# Altium PCB TEMP_SENS_1.PcbDoc
Units mil, origin at the board's own origin, x right, y up, seen from the top; angles counter-clockwise.
Board outline 866.14 x 944.88 mil, 2 copper layers (Top Layer, Bottom Layer); 18 components, 9 nets, 41 pads, 25 vias.
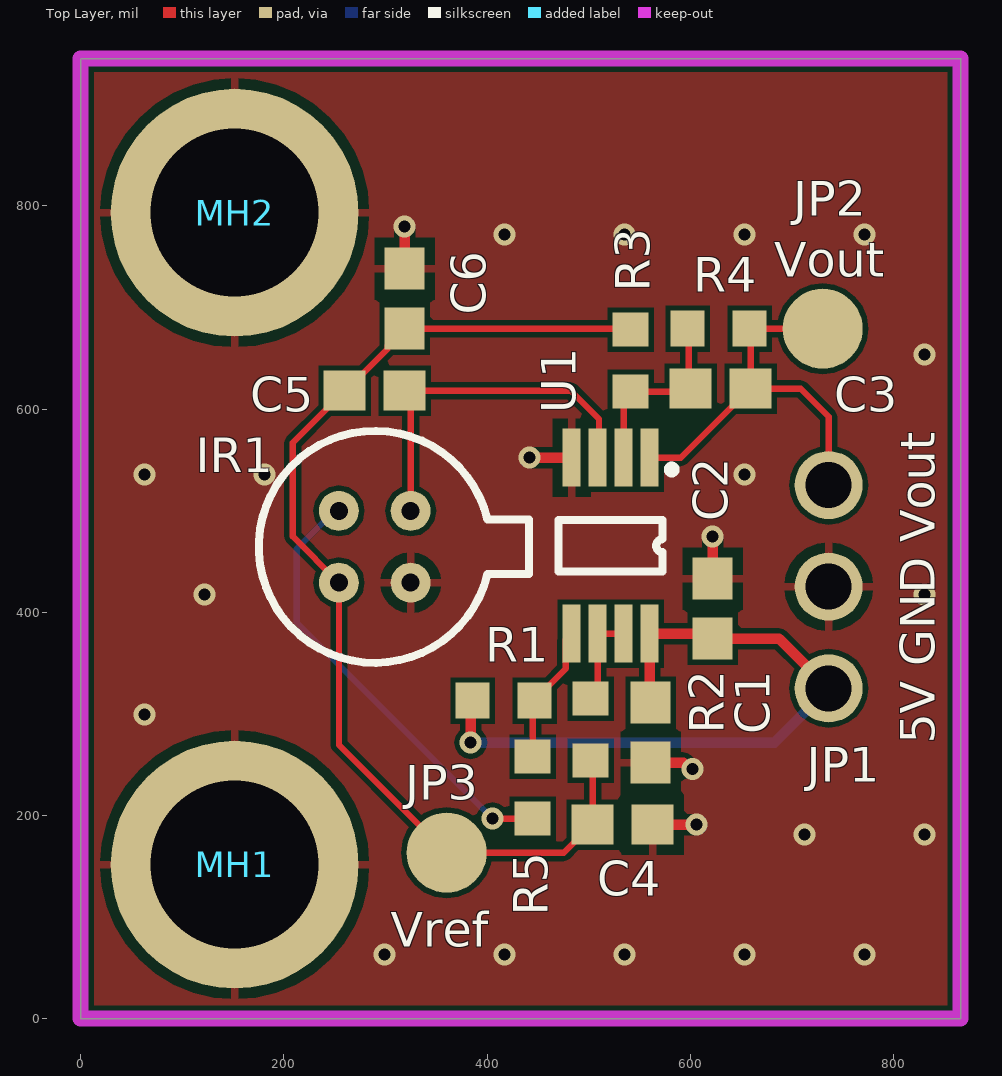
[diagram p0: Top Layer view]
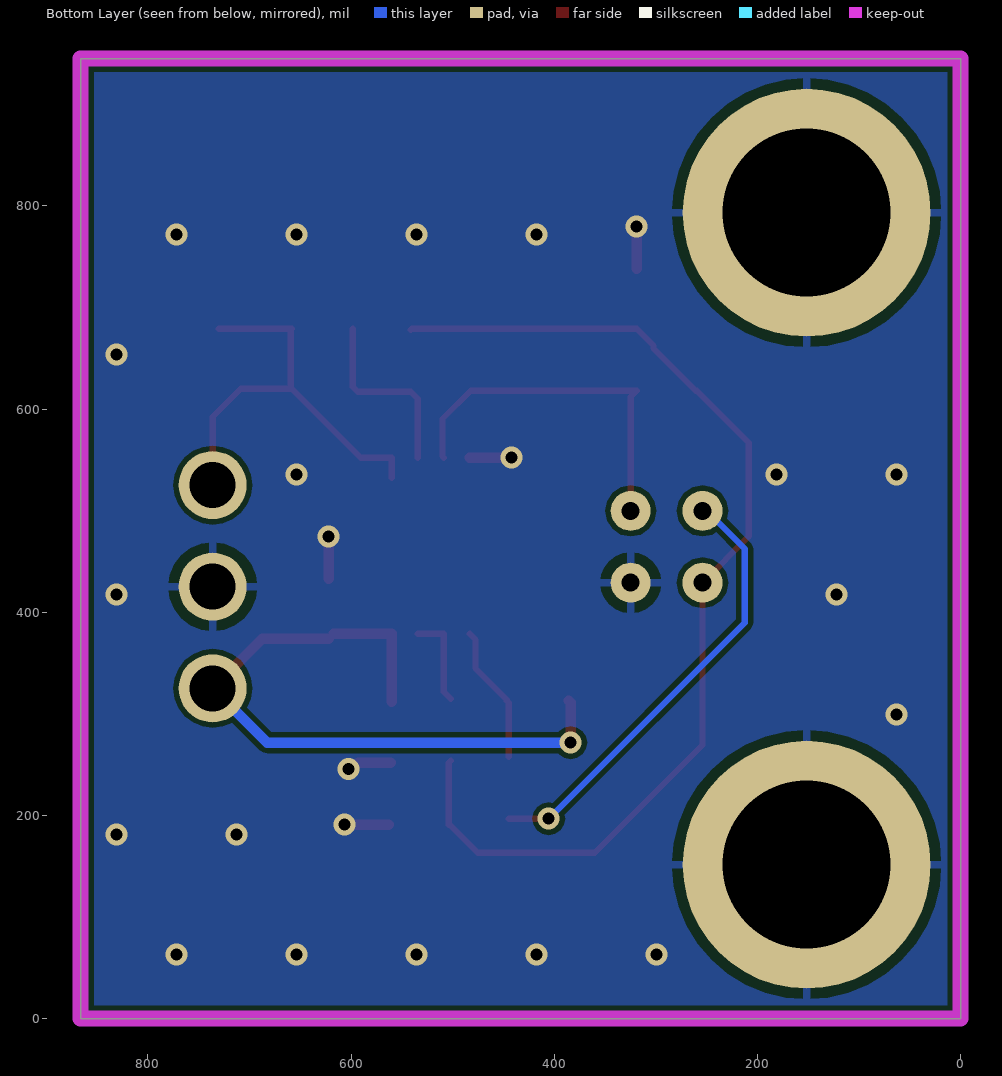
[diagram p1: Bottom Layer view, seen from below]
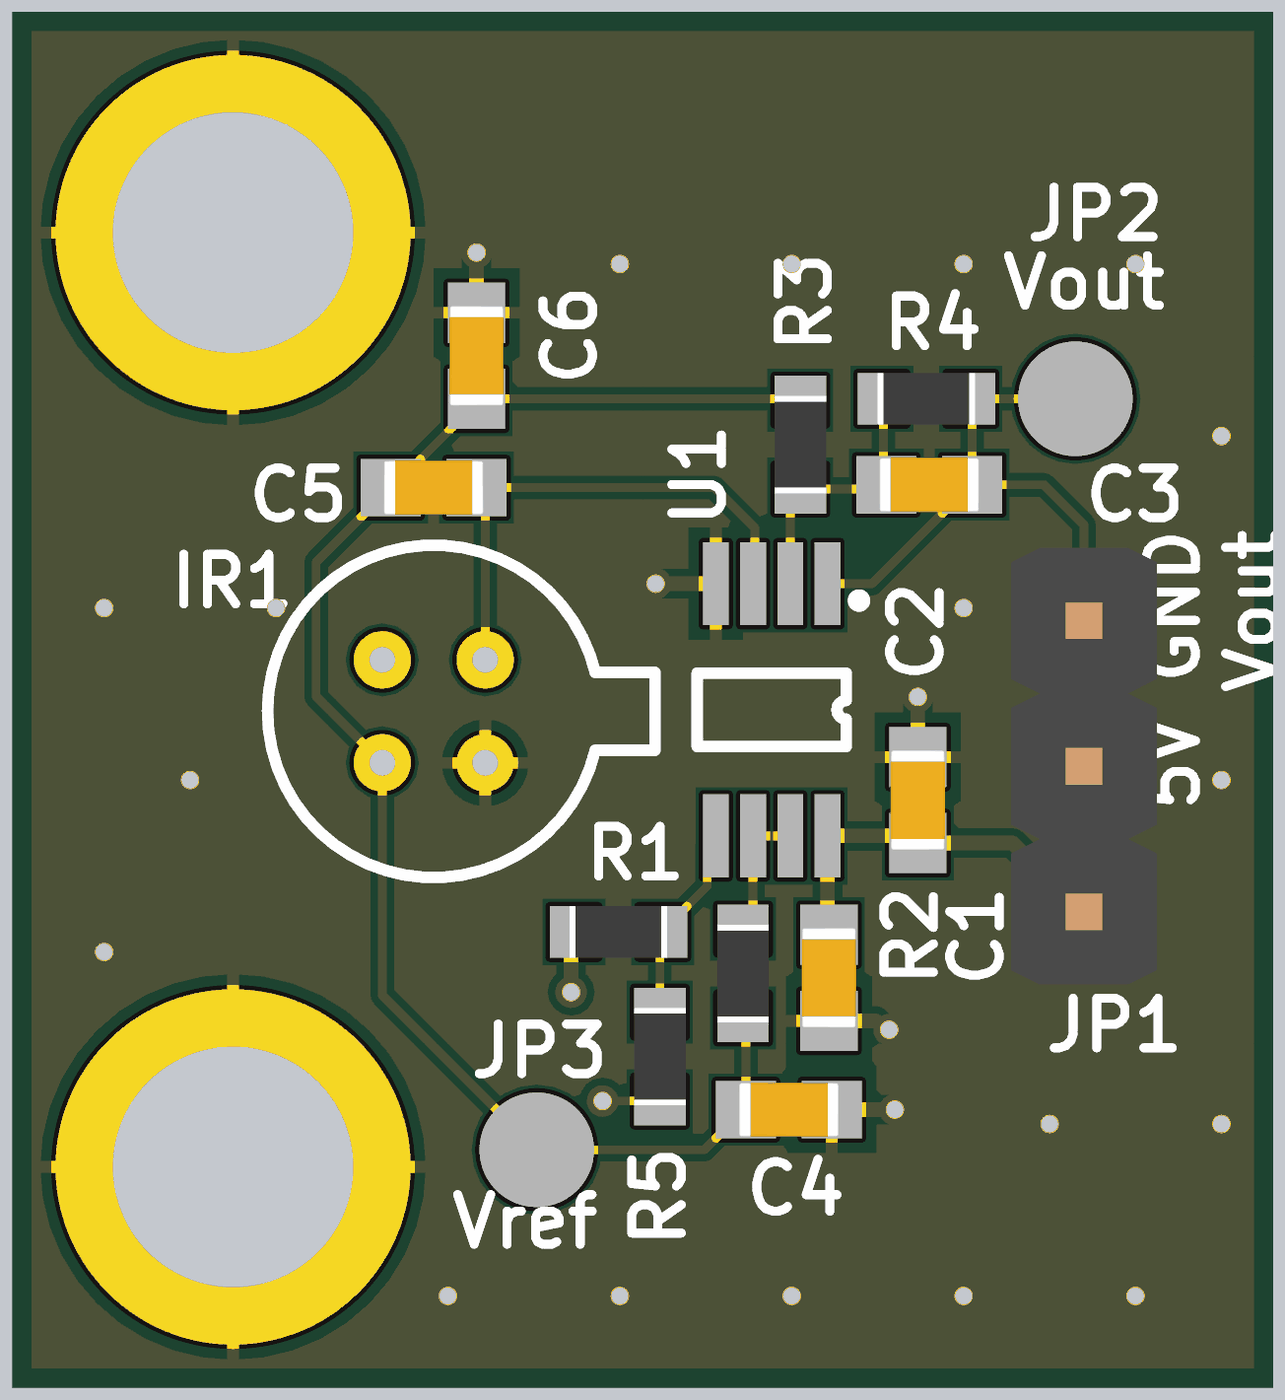
[diagram p2: 3D render of the assembled board from above, using the file's embedded part models]

## Layer stack, top to bottom
Top Solder: solder mask 0.4, Solder Resist, Dk 3.5
Top Layer: signal copper 1.4
Dielectric 1: dielectric 12.6, FR-4, Dk 4.8
Bottom Layer: signal copper 1.4
Bottom Solder: solder mask 0.4, Solder Resist, Dk 3.5

## Board outline
0,0 866.14,0 866.14,944.88 0,944.88

## Design rules (kind name [scope] priority, off if disabled: settings)
BoardOutlineClearance [All] p1: gap=7.87 ignorepadtopadclearanceinfootprint=FALSE
Clearance "Stitching HV_GND" [IsStitchingVia and InNet('HV_GND') vs (IsVia and (Not IsStitchingVia)) Or IsPad] p1: gap=5 ignorepadtopadclearanceinfootprint=FALSE
Clearance [All] p2: gap=5 ignorepadtopadclearanceinfootprint=TRUE except(7.87: Arc-SMDPad Track-SMDPad; 9.84: SMDPad-Hole THPad-Hole Via-Hole Fill-Hole Poly-Hole Region-Hole Text-Hole; 10: Arc-Via Arc-Hole Track-Via Track-Hole Via-Via; 12.99: Arc-THPad Track-THPad; 19.68: THPad-THPad; 21.26: SMDPad-THPad)
ComponentClearance [All] p1: gap=5 collisioncheckmode=3 verticalgap=5 showdistances=TRUE
DiffPairsRouting [All] p1: maxlimit=10 minlimit=5 mostfreqgap=5 toplayer_minwidth=5 toplayer_maxwidth=1000 toplayer_prefwidth=5 bottomlayer_minwidth=5 bottomlayer_maxwidth=1000 bottomlayer_prefwidth=5 maxuncoupledlength=500
Height [All] p1: minheight=0 maxheight=71497.94 prefheight=500
HoleSize [All] p1: absolutevalues=TRUE maxlimit=248.03 minlimit=11.81 maxpercent=80.000 minpercent=20.000
HoleToHoleClearance [All] p1: gap=9.84 allowstackedmicrovias=FALSE
MinimumAnnularRing [All] p1: minimumring=3
MinimumSolderMaskSliver [All] p1: minsoldermaskwidth=0
PlaneClearance [All] p1: clearance=5
PlaneConnect PlaneConnectPowerPads [InPadClass('PowerPads')] p1: planeconnectstyle=Direct reliefexpansion=20 reliefentries=4 reliefconductorwidth=10 reliefairgap=10
PlaneConnect [All] p2: pad.planeconnectstyle=Relief pad.reliefexpansion=11.81 pad.reliefentries=4 pad.reliefconductorwidth=10 pad.reliefairgap=5 via.planeconnectstyle=Direct via.reliefexpansion=11.81 via.reliefentries=4 via.reliefconductorwidth=5 via.reliefairgap=5
PolygonConnect PolygonConnectPowerPads [All vs (InPadClass('PowerPads'))] p1: connectstyle=Direct reliefconductorwidth=10 reliefentries=4 polygonreliefangle="90 Angle" airgapwidth=10
PolygonConnect [All] p2: thpad.connectstyle=Relief thpad.reliefconductorwidth=8 thpad.reliefentries=4 thpad.polygonreliefangle="90 Angle" thpad.airgapwidth=10 smdpad.connectstyle=Relief smdpad.reliefconductorwidth=8 smdpad.reliefentries=4 smdpad.polygonreliefangle="90 Angle" smdpad.airgapwidth=10 via.connectstyle=Direct via.reliefconductorwidth=8 via.reliefentries=4 via.polygonreliefangle="90 Angle" via.airgapwidth=10
RoutingVias [All] p1: holewidth=11.81 width=21.65 viastyle="Through Hole" minholewidth=7.87 minwidth=17.72 maxholewidth=23.62 maxwidth=259.84
SilkToSilkClearance [All] p1: silktosilkclearance=0
SilkToSolderMaskClearance [IsPad] p1: minsilkscreentomaskgap=0 clearancetoexposedcopper=TRUE
SolderMaskExpansion SolderMaskExpansion_Via [IsVia] p1: expansion=4 istentingtop=TRUE
SolderMaskExpansion [All] p2: expansion=2.95 istentingtop=FALSE
Width [All] p1: maxlimit=1000 minlimit=5.12 preferedwidth=6 minimp=50.000000 maximp=50.000000 favimp=50.000000
20 further rules are at their usual default settings.

## Components (designator, comment, footprint, x,y, rotation, side; value= is the part's Value field where it differs from the comment)
C1 "0.1uF" CAP-0603 561.02,281.5 r90 top
C2 "1uF" CAP-0603 622.05,403.54 r270 top
C3 "1uF" CAP-0603 629.92,620.08 r180 top
C4 "0.1uF" CAP-0603 533.46,190.94 r180 top
C5 "1uF" CAP-0603 289.37,618.11 r0 top
C6 "1uF" CAP-0603 318.9,708.66 r270 top
IR1 "ZTP-148SRC1" ZTP-148SRC1 289.45,464.49 r0 top
JP1 "732-5316-ND" 3PIN-JP 736.22,525.2 r270 top
JP2 "Testpoint2" TP2 730.32,679.13 r0 top
JP3 "Testpoint2" TP2 360.24,163.39 r0 top
MH1 "MountingHole" MH4.2MM#1 151.57,151.57 r0 top
MH2 "MountingHole" MH4.2MM#2 210.63,793.31 r0 top
R1 "750k 1%" RES-0603 416.34,312.99 r180 top
R2 "100R 1%" RES-0603 501.97,284.45 r270 top
R3 "1K" RES-0603 541.34,647.64 r270 top
R4 "200k 1%" RES-0603 627.95,679.13 r0 top
R5 "75k 1%" RES-0603 444.88,227.36 r90 top
U1 "TLV2333IDR" TSSOP65P505X110-8 521.65,465.55 r270 top

## Footprints (in the part's own frame and the unit in brackets; to place one, negate y for a bottom-side part, rotate by r counter-clockwise, add the part's x,y. Pads: shape width x height; smd on the part's side, far side on the other; paste and mask are expansions set on the pad)
3PIN-JP [mm]
  round 1.7 hole 1.15: 1(0,0) 2(2.54,0) 3(5.08,0)
  body extent -1.31,-1.27 6.31,1.27, height 8.57
CAP-0603 [mm] "Chip Capacitor, 2-Leads, Body 1.60x0.80mm, IPC Medium Density"
  rect 1.05x1 smd: 1(-0.75,0) 2(0.75,0)
  body extent -0.87,-0.48 0.87,0.48, height 0.9
MH4.2MM#1 [mm] "Mounting Hole, 4.2mm"
  round 6.2 hole 4.2: 1(0,0)
MH4.2MM#2 [mm] "Mounting Hole, 4.2mm"
  round 6.2 hole 4.2: 1(-1.5,0)
RES-0603 [mm] "Chip Resistor, 2-Leads, Body 1.60x0.80mm, IPC Medium Density"
  rect 0.85x0.9 smd: 1(-0.775,0) 2(0.775,0)
  body extent -0.85,-0.45 0.85,0.45, height 0.55
TP2 [mm]
  round 2 smd: 1(0,0)
TSSOP65P505X110-8 [mm] "VSSOP, 8-Leads, Body 3.1X3.1mm, Pitch 0.65mm, IPC Medium Density"
  rect 1.45x0.45 smd: 1(-2.2,0.975) 2(-2.2,0.325) 3(-2.2,-0.325) 4(-2.2,-0.975) 5(2.2,-0.975) 6(2.2,-0.325) 7(2.2,0.325) 8(2.2,0.975)
  silkscreen extent -2,-1.3 0.64,1.62, body extent -1.55,-1.55 1.55,1.55, height 0.95
ZTP-148SRC1 [mm] "IR Temperature Sensor"
  round 1 hole 0.45: 1(0.898,-0.898) 2(-0.898,-0.898) 3(-0.898,0.898) 4(0.898,0.898)
  silkscreen extent -2.9,-2.9 3.86,2.9, body extent -2.7,-2.7 2.7,2.7, height 3.18

## Part data
C1 C4: library part 0603-0.1uF-16V, "CAP CER 0.1UF 16V X7R 0603", Capacitance=100nF, Case Code (Imperial)=0603, Case Code (Metric)=1608, Dielectric=X7R, Dielectric Material=Ceramic, Manufacturer=KEMET, Manufacturer Part Number=C0603C104M4RACTU, Max Operating Temperature=125°C, Min Operating Temperature=-55°C, Package Quantity=1, Supplier Part Number 1=399-1099-6-ND, Tolerance=20%, Voltage Rating=16V, Case/Package=0603, ComponentLink1Description=https://www.verical.com/server-webapp/html/getDatasheet?partID=66190&src-supplier=Verical, ComponentLink1URL=https://www.verical.com/server-webapp/html/getDatasheet?partID=66190&src-supplier=Verical, ComponentLink2Description=http://www.farnell.com/datasheets/2746055.pdf?src-supplier=Element14, ComponentLink2URL=http://www.farnell.com/datasheets/2746055.pdf?src-supplier=Element14, ComponentLink3Description=http://www.farnell.com/datasheets/2123765.pdf?src-supplier=Element14, ComponentLink3URL=http://www.farnell.com/datasheets/2123765.pdf?src-supplier=Element14, ComponentLink4Description=http://www.alliedelec.com/m/d/9bfe7773041ffe9d406e68bc7b377fdd.pdf?src-supplier=Allied+Electronics, ComponentLink4URL=http://www.alliedelec.com/m/d/9bfe7773041ffe9d406e68bc7b377fdd.pdf?src-supplier=Allied+Electronics, ComponentLink5Description=https://www.verical.com/server-webapp/html/getDatasheet?partID=302288&src-supplier=Verical, ComponentLink5URL=https://www.verical.com/server-webapp/html/getDatasheet?partID=302288&src-supplier=Verical, Depth=0.8mm, Height=0.8mm, Lead Pitch=0.7mm, Length=1.6mm, Mount="Surface Mount,PCB", Number of Pins=2, Packaging="Tape and Reel", Pricing 1="1=0.1, 10=0.036, 100=0.0161, 500=0.01152, 1000=0.00904 (USD)", Radiation Hardening=No, REACH SVHC="No SVHC", Stock 1=254524, Supplier 1=Digi-Key, Termination=SMD/SMT, Thickness=0.034inch, Voltage Rating (DC)=16V, Width=0.031inch
C2 C3 C5 C6: library part 0603-1uF-16V, "CAP CER 1UF 16V X7R 0603", Case Code (Imperial)=0603, Case Code (Metric)=1608, Dielectric=X7R, Dielectric Material=Ceramic, Manufacturer=KEMET, Manufacturer Part Number=C0603C105K4RACTU, Max Operating Temperature=125°C, Min Operating Temperature=-55°C, Package Quantity=4000, Supplier Part Number 1=399-7847-6-ND, Tolerance=10%, Voltage=16V, Capacitance=1uF, Case/Package=0603, ComponentLink1Description=http://www.mouser.com/ds/2/212/KEM_C1002_X7R_SMD-1102033.pdf?src-supplier=Mouser, ComponentLink1URL=http://www.mouser.com/ds/2/212/KEM_C1002_X7R_SMD-1102033.pdf?src-supplier=Mouser, ComponentLink2Description=http://www.kemet.com/kemet/web/homepage/kechome.nsf/file/Commercial%20Ceramic%20Chips%20X7R%20Dielectric/$file/KEM_C1002_X7R_SMD.pdf?src-supplier=Element14, ComponentLink2URL=http://www.kemet.com/kemet/web/homepage/kechome.nsf/file/Commercial%20Ceramic%20Chips%20X7R%20Dielectric/$file/KEM_C1002_X7R_SMD.pdf?src-supplier=Element14, ComponentLink3Description=https://www.verical.com/server-webapp/html/getDatasheet?partID=385479&src-supplier=Verical, ComponentLink3URL=https://www.verical.com/server-webapp/html/getDatasheet?partID=385479&src-supplier=Verical, ComponentLink4Description=http://www.kemet.com/kemet/web/homepage/kechome.nsf/vapubfiles/KEM_C1002_X7R_SMD.pdf/$file/KEM_C1002_X7R_SMD.pdf?src-supplier=Element14, ComponentLink4URL=http://www.kemet.com/kemet/web/homepage/kechome.nsf/vapubfiles/KEM_C1002_X7R_SMD.pdf/$file/KEM_C1002_X7R_SMD.pdf?src-supplier=Element14, Contact Plating=Tin,Matte, Depth=0.8mm, Dissipation Factor=3.5%, Height=0.8mm, Length=1.6mm, Mount="Surface Mount,PCB", Number of Pins=2, Packaging="Tape and Reel", Pricing 1="1=0.12, 10=0.088, 100=0.0391, 500=0.02792, 1000=0.02193 (USD)", Radiation Hardening=No, REACH SVHC="No SVHC", Stock 1=600463, Supplier 1=Digi-Key, Termination=SMD/SMT, Thickness=0.034inch, Voltage Rating=16V, Voltage Rating (DC)=16V, Width=0.031inch
IR1: library part IR_ZTP-148SRC1, "THERMOPILE IR SENSOR with thermistor", Manufacturer=Amphenol, Supplier Part Number 1=45-ZTP-148SRC1-ND, Manufacturer Part Number=ZTP-148SRC1, Pricing 1="1=3.10000, 10=2.80800, 25=2.51560, 50=2.22300, 100=2.16450, 500=1.81350, 1000=1.69650, 5000=1.57950 (USD)", RoHS=No, Stock 1=97895, Supplier 1=Digi-Key
JP1: library part 3PIN-TEST, "CONN HEADER VERT 3POS 2.54MM"
JP2 JP3: "Single layer pad TP"
MH1 MH2: library part MH4.2mm, "Mounting hole, 4.2mm", Case=TH
R1: library part 0603-750K, "RES SMD 750K OHM 1% 1/10W 0603", Case Code (Imperial)=0603, Case Code (Metric)=1608, Manufacturer="Stackpole Electronics", Manufacturer Part Number=RMCF0603FT750K, Max Operating Temperature=155°C, Max Power Dissipation=100mW, Min Operating Temperature=-55°C, Resistance=750kR, Resistor Type="Thick Film", Supplier Part Number 1=RMCF0603FT750KCT-ND, Temperature Coefficient=100ppm/°C, Tolerance=1%, Case/Package=0603, Category="Chip SMD Resistors", ComponentLink1Description=http://components.arrow.com/part/dataview/44988031S7440371N1174?src-supplier=Arrow+Electronics, ComponentLink1URL=http://components.arrow.com/part/dataview/44988031S7440371N1174?src-supplier=Arrow+Electronics, ComponentLink2Description=https://www.seielect.com/Catalog/SEI-RMCF_RMCP.pdf?src-supplier=Digi-Key, ComponentLink2URL=https://www.seielect.com/Catalog/SEI-RMCF_RMCP.pdf?src-supplier=Digi-Key, ComponentLink3Description=https://www.seielect.com/catalog/SEI-Packaging.pdf?src-supplier=Digi-Key, ComponentLink3URL=https://www.seielect.com/catalog/SEI-Packaging.pdf?src-supplier=Digi-Key, ComponentLink4Description=http://www.seielect.com/Catalog/SEI-RMC.pdf?src-supplier=Future+Electronics, ComponentLink4URL=http://www.seielect.com/Catalog/SEI-RMC.pdf?src-supplier=Future+Electronics, ComponentLink5Description=https://www.seielect.com/catalog/SEI-RMCF_RMCP.pdf?src-supplier=Avnet, ComponentLink5URL=https://www.seielect.com/catalog/SEI-RMCF_RMCP.pdf?src-supplier=Avnet, Contact Plating=Tin,Matte, Features="Automotive AEC-Q200", Height=0.022inch, Lead Free="Lead Free", Length=0.061inch, Manufacturer Product Number=RMCF0603FT750K, Mount="Surface Mount", Number of Terminations=2, Packaging="Tape and Reel", Power Rating=100mW, Pricing 1="1=0.10000, 10=0.01600, 100=0.00650, 1000=0.00292, 2500=0.00253 (USD)", Radiation Hardening=No, RoHS=Yes, RoHS Compliant=Yes, Series=RMCF, Size Code=0603, Stock 1=145363, Supplier 1=Digi-Key, Width=0.031inch
R2: library part 0603-100R, "RES 100 OHM 1% 1/8W 0603", Case Code (Imperial)=0603, Case Code (Metric)=1608, Manufacturer="Stackpole Electronics", Manufacturer Part Number=RNCP0603FTD100R, Max Operating Temperature=155°C, Max Power Dissipation=125mW, Min Operating Temperature=-55°C, Resistance=100R, Resistor Type="Thin Film", Supplier Part Number 1=RNCP0603FTD100RCT-ND, Temperature Coefficient=100ppm/°C, Tolerance=1%, Case/Package=0603, Category="Chip SMD Resistors", ComponentLink1Description=https://www.seielect.com/catalog/SEI-Packaging.pdf?src-supplier=Digi-Key, ComponentLink1URL=https://www.seielect.com/catalog/SEI-Packaging.pdf?src-supplier=Digi-Key, ComponentLink2Description=https://www.seielect.com/Catalog/SEI-rncp.pdf?src-supplier=Avnet, ComponentLink2URL=https://www.seielect.com/Catalog/SEI-rncp.pdf?src-supplier=Avnet, Contact Plating=Tin,Matte, Features="Moisture Resistant,Anti-Sulfur", Height=0.02inch, Lead Free="Lead Free", Length=0.059inch, Manufacturer Product Number=RNCP0603FTD100R, Mount="Surface Mount", Number of Terminations=2, Packaging="Tape and Reel", Pricing 1="1=0.10000, 10=0.05800, 100=0.02360, 1000=0.01060, 2500=0.00920 (USD)", Radiation Hardening=No, RoHS=Yes, RoHS Compliant=Yes, Series=RNCP, Stock 1=158067, Supplier 1=Digi-Key, Width=0.031inch
R3: library part 0603-1KR, "RES SMD 1K OHM 1% 1/10W 0603", Case Code (Imperial)=0603, Case Code (Metric)=1608, Manufacturer="Vishay Dale", Manufacturer Part Number=CRCW06031K00FKEA, Max Operating Temperature=155°C, Max Power Dissipation=100mW, Min Operating Temperature=-55°C, Package Quantity=10, Resistance=1kR, Supplier Part Number 1=541-1.00KHCT-ND, Temperature Coefficient=100ppm/°C, Tolerance=1%, Voltage Rating=75V, Case/Package=0603, ComponentLink1Description=http://www.vishay.com/docs/20035/dcrcwe3.pdf?src-supplier=Digi-Key, ComponentLink1URL=http://www.vishay.com/docs/20035/dcrcwe3.pdf?src-supplier=Digi-Key, ComponentLink2Description=http://uk.rs-online.com/webdocs/0d98/0900766b80d98afc.pdf?src-supplier=RSComponents, ComponentLink2URL=http://uk.rs-online.com/webdocs/0d98/0900766b80d98afc.pdf?src-supplier=RSComponents, ComponentLink3Description=http://www.vishay.com/docs/20035/dcrcwe3.pdf?src-supplier=Avnet, ComponentLink3URL=http://www.vishay.com/docs/20035/dcrcwe3.pdf?src-supplier=Avnet, ComponentLink4Description=http://www.vishay.com/docs/20035/dcrcwe3.pdf?src-supplier=Avnet+Asia, ComponentLink4URL=http://www.vishay.com/docs/20035/dcrcwe3.pdf?src-supplier=Avnet+Asia, ComponentLink5Description=http://www.farnell.com/datasheets/2310790.pdf?src-supplier=Element14, ComponentLink5URL=http://www.farnell.com/datasheets/2310790.pdf?src-supplier=Element14, ComponentLink6Description=https://www.distrelec.biz/Web/Downloads/a_/en/flD-CRCW-e3_data_en.pdf?mime=application%2Fpdf&src-supplier=Distrelec, ComponentLink6URL=https://www.distrelec.biz/Web/Downloads/a_/en/flD-CRCW-e3_data_en.pdf?mime=application%2Fpdf&src-supplier=Distrelec, ComponentLink7Description=http://www.vishay.com/docs/20035/dcrcwe3.pdf?src-supplier=Future+Electronics, ComponentLink7URL=http://www.vishay.com/docs/20035/dcrcwe3.pdf?src-supplier=Future+Electronics, ComponentLink8Description=http://www.vishay.com/docs/20035/dcrcwe3.pdf?src-supplier=Avnet+Europe, ComponentLink8URL=http://www.vishay.com/docs/20035/dcrcwe3.pdf?src-supplier=Avnet+Europe, Composition="Thick Film", Contact Plating=Tin, Depth=0.85mm, Features="Automotive AEC-Q200", Height=0.45mm, Lead Free="Lead Free", Length=1.55mm, Military Standard=Not, Mount="Surface Mount", Number of Pins=2, Number of Terminations=2, Packaging="Tape and Reel", Power Rating=100mW, Pricing 1="1=0.1, 10=0.034, 100=0.0139, 1000=0.00623, 2500=0.0054 (USD)", Radiation Hardening=No, REACH SVHC=Unknown, Stock 1=671453, Supplier 1=Digi-Key, Termination=SMD/SMT, Voltage Rating (DC)=75V, Weight=7.1E-05oz, Width=0.033inch
R4: library part 0603-200K, "YAGEO - RC0603FR-07200KL - SMD Chip Resistor, 0603 [1608 Metric], 200 kohm, RC Series, 75 V, Thick Film, 100 mW", Case Code (Imperial)=0603, Case Code (Metric)=1608, Manufacturer=Yageo, Manufacturer Part Number=RC0603FR-07200KL, Max Operating Temperature=155°C, Max Power Dissipation=100mW, Min Operating Temperature=-55°C, Package Quantity=1, Resistance=200kR, Resistance Tolerance=1%, Resistor Type="Thick Film", Supplier Part Number 1=311-200KHRCT-ND, Temperature Coefficient=100ppm/°C, Voltage Rating=50V, Case/Package=0603, Category="Chip SMD Resistors", ComponentLink1Description=https://datasheet.ciiva.com/2453/pyu-r-int-thick-7-2453958.pdf?src-supplier=Digi-Key, ComponentLink1URL=https://datasheet.ciiva.com/2453/pyu-r-int-thick-7-2453958.pdf?src-supplier=Digi-Key, ComponentLink2Description=https://datasheet.ciiva.com/2453/pyu-r-int-thick-7-2453959.pdf?src-supplier=Digi-Key, ComponentLink2URL=https://datasheet.ciiva.com/2453/pyu-r-int-thick-7-2453959.pdf?src-supplier=Digi-Key, ComponentLink3Description=https://datasheet.ciiva.com/2453/pyu-r-int-thick-7-2453960.pdf?src-supplier=Digi-Key, ComponentLink3URL=https://datasheet.ciiva.com/2453/pyu-r-int-thick-7-2453960.pdf?src-supplier=Digi-Key, Construction=Rectangular, Depth=0.8mm, Features="Moisture Resistant", Height=0.022inch, Lead Free="Lead Free", Length=1.6mm, Manufacturer Product Number=RC0603FR-07200KL, Military Standard=Not, Number of Pins=2, Number of Terminations=2, Packaging="Tape and Reel", Power Rating=100mW, Pricing 1="1=0.10000, 10=0.02300, 100=0.00930, 1000=0.00417, 2500=0.00362 (USD)", REACH SVHC="No SVHC", RoHS=Yes, RoHS Compliant=Yes, Series=RC, Size Code=0603, Stock 1=1032067, Supplier 1=Digi-Key, Termination=SMD/SMT, Tolerance=1%, Voltage Rating (DC)=50V, Width=0.031inch
R5: library part 0603-75K, "75 kohm, 75 V, 0603 [1608 Metric], 100 mW,  1%", Case Code (Imperial)=0603, Case Code (Metric)=1608, Manufacturer="Vishay BCcomponents", Manufacturer Part Number=MCT06030C7502FP500, Max Operating Temperature=125°C, Max Power Dissipation=125mW, Min Operating Temperature=-55°C, Package Quantity=5000, Power Rating=100mW, Resistance=75kR, Resistance Tolerance=1%, Resistor Type="Thin Film", Supplier Part Number 1=749-1681-1-ND, Temperature Coefficient=50ppm/°C, Voltage Rating=75V, Case/Package=0603, Category="Chip SMD Resistors", ComponentLink1Description=https://datasheet.ciiva.com/2571/mc-pro-2571677.pdf?src-supplier=Digi-Key, ComponentLink1URL=https://datasheet.ciiva.com/2571/mc-pro-2571677.pdf?src-supplier=Digi-Key, ComponentLink2Description=https://datasheet.ciiva.com/16854/mc-pro-16854780.pdf?src-supplier=Avnet+Europe, ComponentLink2URL=https://datasheet.ciiva.com/16854/mc-pro-16854780.pdf?src-supplier=Avnet+Europe, Construction=Rectangular, Contact Plating=Tin, Depth=0.85mm, Height=0.022inch, Lead Free="Lead Free", Length=0.061inch, Manufacturer Product Number=MCT06030C7502FP500, Military Standard=Not, Mount="Surface Mount", Number of Terminations=2, Packaging="Tape and Reel", Pricing 1="1=0.13000, 10=0.12100, 100=0.04650, 1000=0.02046, 2500=0.01767 (USD)", Radiation Hardening=No, REACH SVHC=Unknown, RoHS=Yes, RoHS Compliant=Yes, Series="MCT 0603 - Professional", Stock 1=36307, Supplier 1=Digi-Key, Tolerance=1%, Voltage Rating (DC)=75V, Width=0.033inch
U1: library part IC_TLV2333, "IC OP AMP ZERO-DRIFT CMOS 8SOIC", Case/Package=SOIC, Input Bias Current=70pA, Input Offset Voltage (Vos)=2uV, Manufacturer="Texas Instruments", Max Operating Temperature=125°C, Min Operating Temperature=-40°C, Operating Supply Current=17uA, Output Current per Channel=5mA, Supplier Part Number 1=296-43772-1-ND, Category="Amplifiers - Op Amps, Buffer, Instrumentation", ComponentLink1Description=http://www.ti.com/lit/ds/symlink/tlv2333.pdf?src-supplier=Digi-Key, ComponentLink1URL=http://www.ti.com/lit/ds/symlink/tlv2333.pdf?src-supplier=Digi-Key, ComponentLink2Description=http://www.ti.com/lit/gpn/tlv2333?src-supplier=Mouser, ComponentLink2URL=http://www.ti.com/lit/gpn/tlv2333?src-supplier=Mouser, Gain Bandwidth Product=350kHz, Lead Free="Lead Free", Manufacturer Part Number=TLV2333IDR, Mount="Surface Mount", Number of Channels=2, Number of Circuits=2, Number of Pins=8, Packaging="Tape and Reel", Pricing 1="1=1.90000, 10=1.70500, 25=1.60840, 100=1.28680, 250=1.12600, 500=1.09382, 1000=0.86862 (USD)", RoHS=Yes, RoHS Compliant=Yes, Slew Rate=0.16V/µs, Stock 1=6297, Supplier 1=Digi-Key

## Via types
v1: diameter 21.65, hole 11.81, Top Layer to Bottom Layer, tented both sides, 25 vias

## Nets (pads, with @x,y where several pads share a name; then routed paths per layer and width w, separated by ;. In a path a pad name is that pad's centre, name@x,y a point inside that pad or via, vN(x,y) a via of type N, cw(c..) or ccw(c..) an arc to the next point about the centre after c; other vN are vias at no path point)
Buf_Out: R2.1 U1.6 U1.7 | length 92.4
  Top Layer w6: R2.1 508.86,321.85 U1.6 U1.7
D+5V: C1.2 C2.2 JP1.3 R1.2 U1.8 | length 683.5
  Top Layer w6: C1.2@560.04,312.01 C1.2 ; C2.2@617.13,378.94 C2.2
  Top Layer w10: v1(383.86,271.65) 383.86,311.02 R1.2 ; C1.2@560.04,312.01 U1.8 C2.2@617.13,378.94 ; C2.2 687.4,374.02 JP1.3
  Bottom Layer w10: v1(383.86,271.65) 682.68,271.65 JP1.3
GND: C1.1 C2.1 C4.1 C6.1 IR1.1 JP1.2 MH1.1 MH2.1 U1.4 | length 211.2
  Top Layer w10: C6.1 v1(318.9,779.53) ; v1(441.93,552.16) U1.4 ; C1.1 593.07,251.97 599.21,245.83 v1(602.36,245.83) ; C4.1 v1(606.3,190.94) ; C2.1 v1(622.05,474.41)
  other v1: 299.21,62.99 417.32,62.99 535.43,62.99 653.54,62.99 771.65,62.99 712.6,181.1 830.71,181.1 62.99,299.21 122.05,417.32 830.71,417.32 62.99,535.43 181.1,535.43 653.54,535.43 830.71,653.54 417.32,771.65 535.43,771.65 653.54,771.65 771.65,771.65
NetC3_2: C3.2 R3.2 R4.1 U1.2 | length 184
  Top Layer w6: U1.2 534.45,610.24 R3.2 593.5,617.13 598.43,622.05 R4.1@598.43,679.13
NetIR1_3: IR1.3 R5.1 | length 441.9
  Top Layer w6: v1(405.51,196.85) R5.1
  Bottom Layer w6: IR1.3 250,499.84 212.6,462.44 212.6,389.76 v1(405.51,196.85)
NetR1_1: R1.1 R5.2 U1.5 | length 137
  Top Layer w6: R5.2 444.88,311.02 R1.1 446.85,313.98 477.41,344.54 477.41,373.08 U1.5
Vout: C3.1 JP1.1 JP2.1 R4.2 U1.1 | length 433.6
  Top Layer w6: U1.1@560.04,532.48 U1.1 590.55,552.16 658.46,620.08 C3.1 ; R4.2 JP2.1 ; R4.2@659.45,679.13 C3.1 ; JP1.1 736.22,592.52 708.66,620.08 C3.1
Vref: C4.2 C5.1 C6.2 IR1.2 JP3.1 R2.2 R3.1 | length 1066.5
  Top Layer w6: R2.2 503.94,251.97 C4.2 502.95,190.94 475.39,163.39 JP3.1 254.09,269.53 IR1.2 254.09,429.29 208.66,474.72 208.66,566.93 C5.1 260.83,618.11 302.21,659.5 302.21,662.45 C6.2 540.35,679.13 R3.1
Vtp: C5.2 IR1.4 U1.3 | length 362
  Top Layer w6: IR1.4 324.8,612.2 C5.2 482.28,618.11 510.05,590.35 510.05,553.35 U1.3

## Polygon pours and split planes (outlines as drawn)
GND on Bottom Layer "NONET_L-01_P-001" (solid, remove dead copper, pour order 1): 0,938.98 866.14,938.98 866.14,0 0,0
GND on Top Layer "NONET_L-01_P-001" (solid, remove dead copper, pour order 0): 0,0 866.14,0 866.14,938.98 0,938.98

## Keep-outs
Keep-Out Layer:
  the board outline again, w15.75

## Silkscreen, mask and mechanical layers (free items; w line width, h text height)
Top Overlay:
  text "Vout" at 682.49,730.32 h34
  text "5V GND Vout" at 840.55,270.41 h34 r90
  text "Vref" at 305.19,70.87 h34
BOARD_OUTLINE:
  lines w10: 866.14,944.88 866.14,0 0,0 0,944.88 866.14,944.88 ; 866.14,944.88 866.14,944.88

## Dimensions
0,944.88 to 0,0 on Drill Guide
0,944.88 to 866.14,944.88 on Drill Guide